# Altium PCB business_card.PcbDoc (part 1 of 2)
Units mil, origin at the board's own origin, x right, y up, seen from the top; angles counter-clockwise.
Board outline 3500 x 2000 mil, 2 copper layers (Top Layer, Bottom Layer); 64 components, 43 nets, 178 pads, 88 vias.
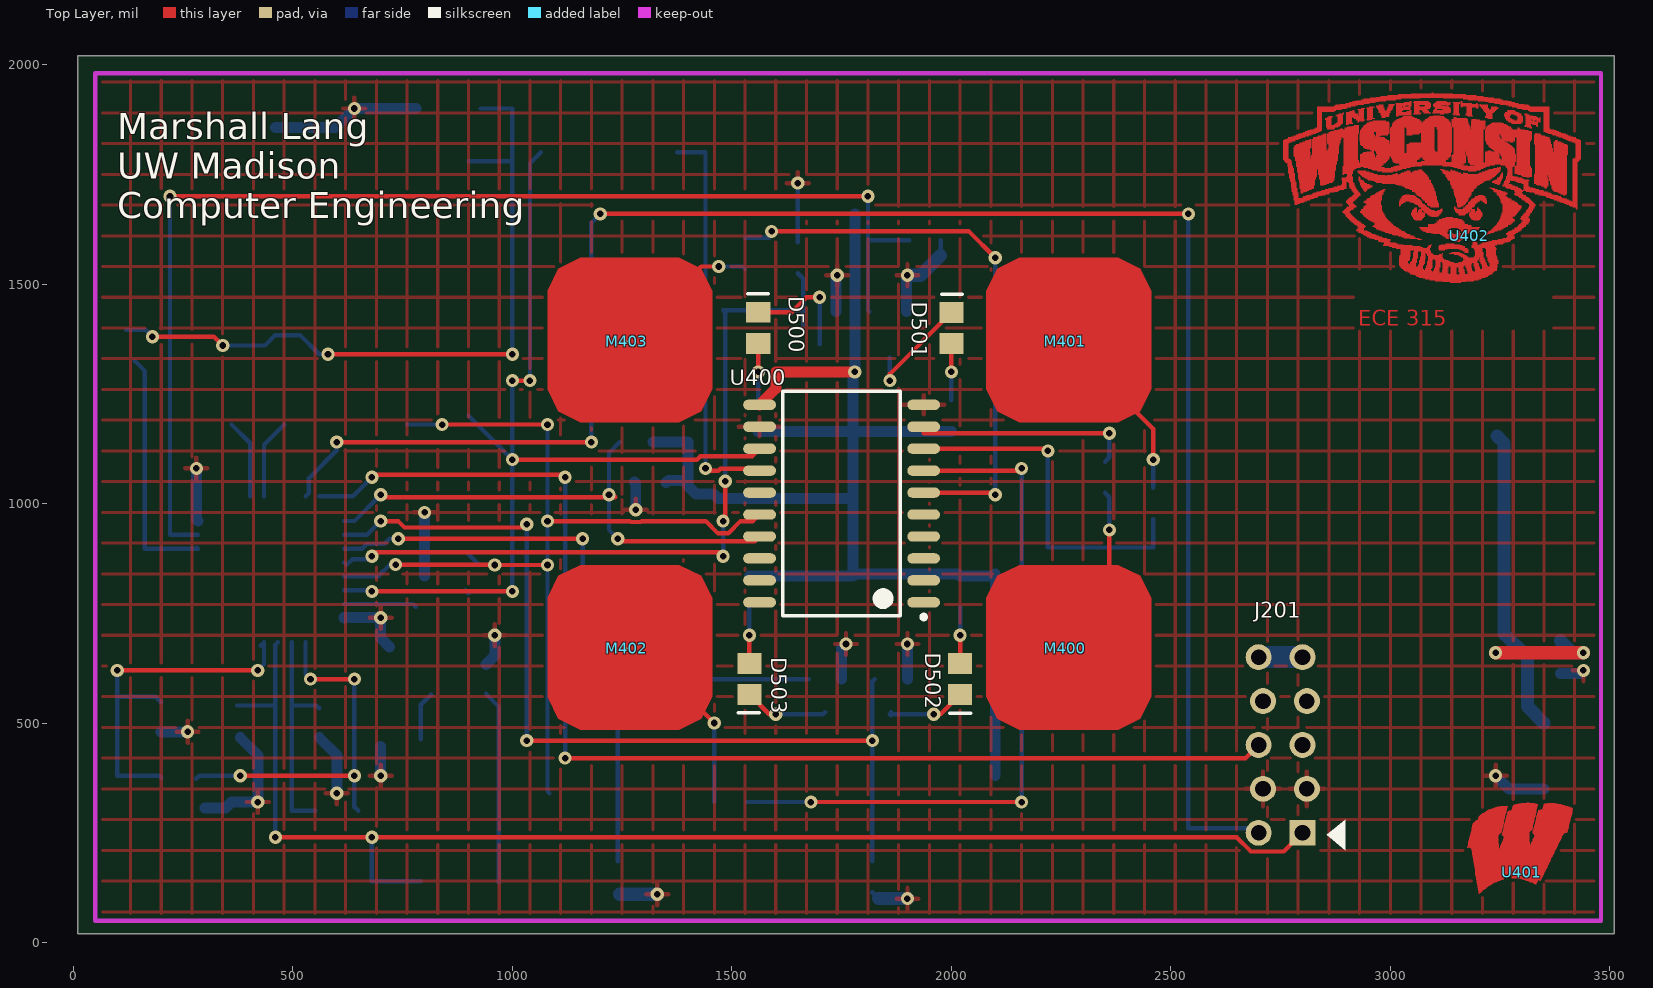
[diagram p0: Top Layer view]
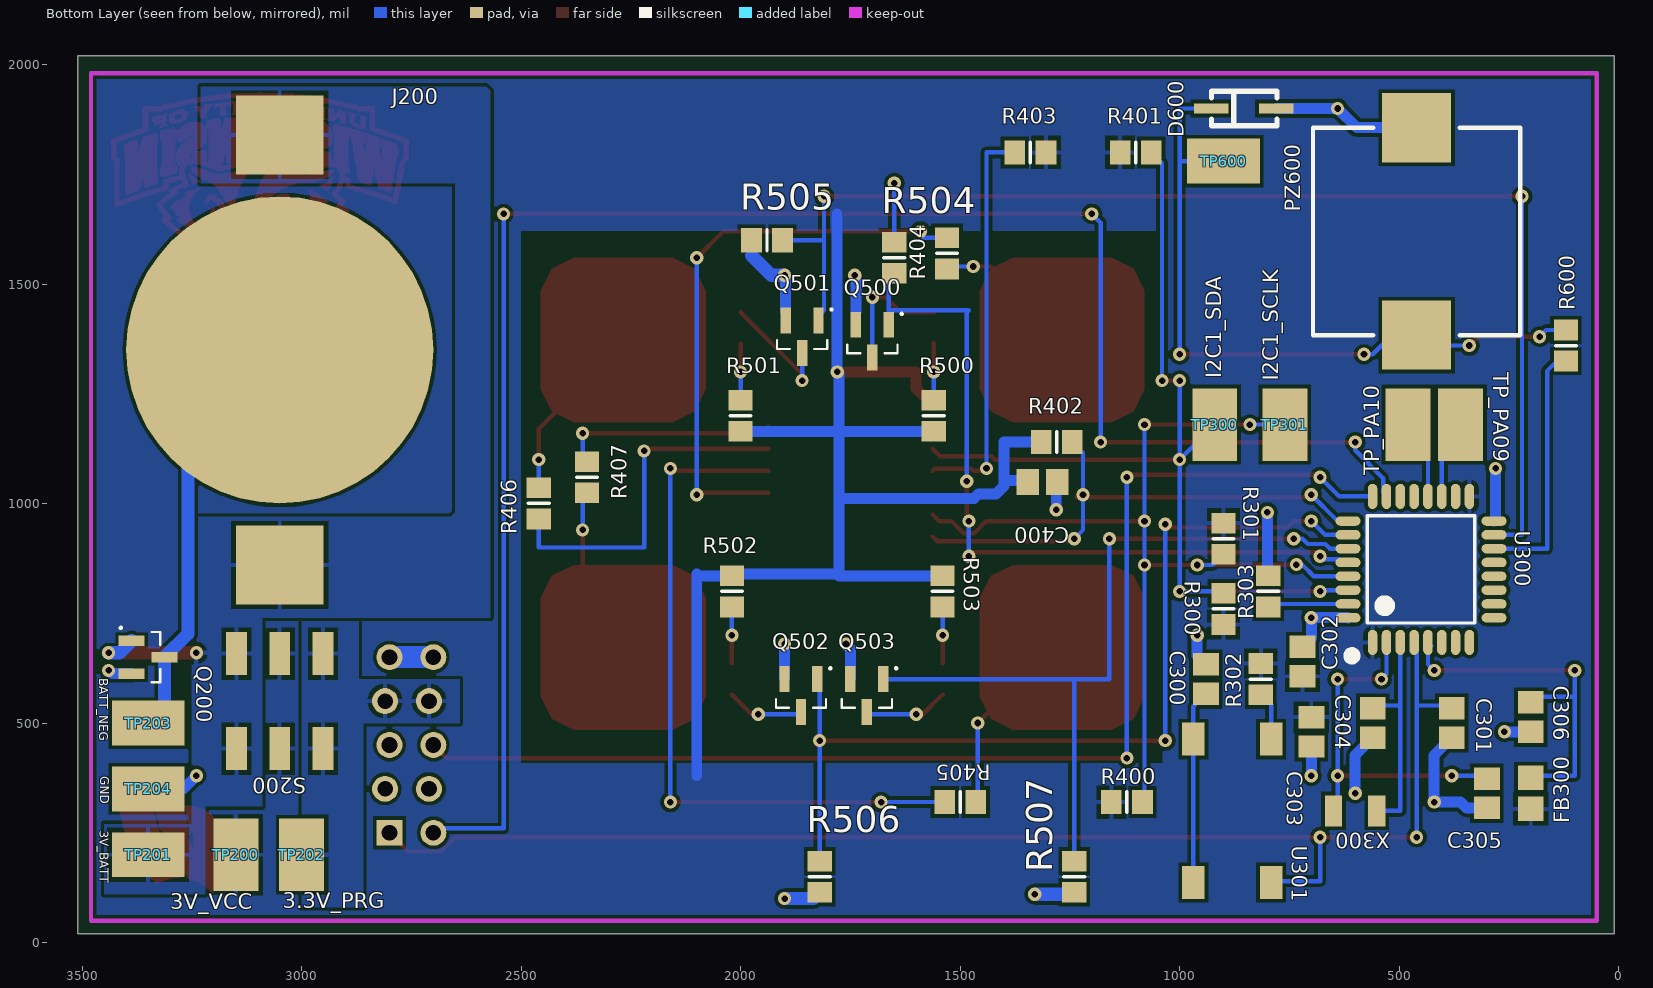
[diagram p1: Bottom Layer view, seen from below]

## Layer stack, top to bottom
Top Solder: solder mask 0.4, Solder Resist, Dk 3.5
Top Layer: signal copper 1.4
Dielectric 1: dielectric 12.6, FR-4, Dk 4.8
Bottom Layer: signal copper 1.4
Bottom Solder: solder mask 0.4, Solder Resist, Dk 3.5

## Board outline
10,20 3510,20 3510,2020 10,2020

## Design rules (kind name [scope] priority, off if disabled: settings)
BoardOutlineClearance [All] p1: gap=10 ignorepadtopadclearanceinfootprint=FALSE except(0: Arc-SplitContinuation Track-SplitContinuation SMDPad-SplitContinuation THPad-SplitContinuation Via-SplitContinuation Fill-SplitContinuation Poly-SplitContinuation Region-SplitContinuation Text-SplitContinuation)
Clearance [All] p1: gap=8 ignorepadtopadclearanceinfootprint=FALSE except(0: Arc-Hole Track-Hole SMDPad-Hole THPad-Hole Via-Hole Fill-Hole Poly-Hole Region-Hole Text-Hole)
HoleSize [All] p1: absolutevalues=TRUE maxlimit=100 minlimit=15 maxpercent=80.000 minpercent=20.000
MinimumAnnularRing [All] p1: minimumring=6
MinimumSolderMaskSliver [All] p1: minsoldermaskwidth=0
PlaneConnect Direct [All] p1: planeconnectstyle=Direct reliefexpansion=20 reliefentries=4 reliefconductorwidth=10 reliefairgap=10
PolygonConnect [All] p1: connectstyle=Relief reliefconductorwidth=10 reliefentries=4 polygonreliefangle="90 Angle" airgapwidth=10
RoomDefinition 02-Power [InComponentClass('02-Power')] p1: confinementstyle=ConfineIn formatcopy=TRUE lockcomponents=FALSE outline 3480,50 2620,50 2620,1990 3480,1990
RoomDefinition 03_MCU [InComponentClass('03_MCU')] p2: confinementstyle=ConfineIn formatcopy=TRUE lockcomponents=FALSE outline 1000,50 54.49,50 54.49,1280 1000,1280
RoomDefinition 06_Buzzer [InComponentClass('06_Buzzer')] p3: confinementstyle=ConfineIn formatcopy=TRUE lockcomponents=FALSE outline 1000,1280 60,1280 60,1950 1000,1950
RoomDefinition 05_LEDs [InComponentClass('05_LEDs')] p4: confinementstyle=ConfineIn formatcopy=TRUE lockcomponents=FALSE outline 1010,70 2590,70 2590,1640 1010,1640
RoutingVias [All] p1: holewidth=15 width=30 viastyle="Through Hole" minholewidth=15 minwidth=30 maxholewidth=28 maxwidth=50
SilkToSilkClearance [All] p1: silktosilkclearance=5
SilkToSolderMaskClearance [IsPad] p1: minsilkscreentomaskgap=0 clearancetoexposedcopper=TRUE
SolderMaskExpansion [All] p1: expansion=4
Width Wisc_Art_Work [HasFootprint('BUCKYBADGER') or HasFootprint('Motion_W')] p1: maxlimit=50 minlimit=99999 preferedwidth=0 toplayer_minwidth=0 bottomlayer_minwidth=0 minimp=50.000000 maximp=50.000000 favimp=50.000000
Width Width_1 [All] p2: maxlimit=50 minlimit=10 preferedwidth=10 minimp=50.000000 maximp=50.000000 favimp=50.000000
25 further rules are at their usual default settings.

## Classes and differential pairs
component class 05_LEDs: D500 D501 D502 D503 Q500 Q501 Q502 Q503 R500 R501 R502 R503 R504 R505 R506 R507
component class 03_MCU: C300 C301 C302 C303 C304 C305 C306 FB300 R300 R301 R302 R303 TP300 TP301 TP_PA09 TP_PA10 U300 U301 X300
component class 06_Buzzer: D600 PZ600 R600 TP600
component class 02-Power: J200 J201 Q200 S200 TP200 TP201 TP202 TP203 TP204

## Components (designator, comment, footprint, x,y, rotation, side; value= is the part's Value field where it differs from the comment)
C300 "CAP_0805_U_001.00" CAP_0805 940,600 r90 bottom
C301 "CAP_0805_U_001.00" CAP_0805 380,500 r270 bottom
C302 "CAP_0805_U_001.00" CAP_0805 720,640 r90 bottom
C303 "CAP_0805_U_001.00" CAP_0805 700,480 r270 bottom
C304 "4.3pF" CAP_0805 560,500 r90 bottom
C305 "4.3pF" CAP_0805 300,340 r90 bottom
C306 "CAP_0805_U_001.00" CAP_0805 200,513.46 r270 bottom
C400 "CAP_0805_U_001.00" CAP_0805 1312,1049 r180 bottom
D500 "LED_GREEN_0805.1" LED_GRN_0805 1560,1400.31 r270 top
D501 "LED_RED_0805.1" LED_RED_0805 2000,1400 r270 top
D502 "LED_ORANGE.0805.1" LED_ORG_0805 2020,600.31 r90 top
D503 "LED_YELLOW_0805.1" LED_YEL_0805 1540,600.31 r90 top
D600 "DIODE_4148" SOD323-12 927.64,1900 r270 bottom
FB300 "330 ohm @ 100 MHz" FB_0805 200,340 r90 bottom
J200 "CONN_BAT_2032" BATT_2032 3050,1350 r90 bottom
J201 "CONN_ST_PROGRAMMER" HDR_5x2 2805,250 r90 top
M400 "Mech_TouchPad" TOUCHPAD 2260,670 r0 top locked
M401 "Mech_TouchPad" TOUCHPAD 2260,1370 r0 top locked
M402 "Mech_TouchPad" TOUCHPAD 1260,670 r0 top locked
M403 "Mech_TouchPad" TOUCHPAD 1260,1370 r0 top locked
PZ600 "Peizo Buzzer" PKLCS 460,1620 r90 bottom
Q200 "IC_NMOS_DMN2020LSN" SOT23 3350,650 r180 bottom
Q500 "IC_NMOS_DMN2020LSN" SOT23 1700,1370 r270 bottom
Q501 "IC_NMOS_DMN2020LSN" SOT23 1860,1380 r270 bottom
Q502 "IC_NMOS_DMN2020LSN" SOT23 1862.6,562.6 r270 bottom
Q503 "IC_NMOS_DMN2020LSN" SOT23 1712.6,562.6 r270 bottom
R300 "10K" RES_0805 900,760 r270 bottom
R301 "10K" RES_0805 900,920 r90 bottom
R302 "10K" RES_0805 815,600 r90 bottom
R303 "10K" RES_0805 798,800 r270 bottom
R400 "RES_0805_R_562_00" RES_0805 1120,320 r0 bottom
R401 "RES_0805_R_562_00" RES_0805 1100,1800 r0 bottom
R402 "RES_0805_R_562_00" RES_0805 1280,1140 r0 bottom
R403 "RES_0805_R_562_00" RES_0805 1340,1800 r180 bottom
R404 "RES_0805_R_562_00" RES_0805 1530,1570 r270 bottom
R405 "RES_0805_R_562_00" RES_0805 1499.69,320 r180 bottom
R406 "RES_0805_R_562_00" RES_0805 2460,1000.31 r90 bottom
R407 "RES_0805_R_562_00" RES_0805 2350,1060 r270 bottom
R500 "330" RES_0805 1560,1200 r270 bottom
R501 "330" RES_0805 2000,1200 r270 bottom
R502 "330" RES_0805 2020,800 r90 bottom
R503 "330" RES_0805 1540,800 r90 bottom
R504 "10K" RES_0805 1650,1560 r270 bottom
R505 "10K" RES_0805 1940,1600 r180 bottom
R506 "10K" RES_0805 1820,150 r90 bottom
R507 "10K" RES_0805 1240,150 r90 bottom
R600 "RES_0805_K_001.00" RES_0805 120,1360 r90 bottom
S200 "SW DPDT" DPDT 3050,550 r180 bottom
TP200 "TP_1206" TP-SMC-1206 3150,200 r270 bottom
TP201 "TP_1206" TP-SMC-1206 3350,200 r0 bottom
TP202 "TP_1206" TP-SMC-1206 3000,200 r270 bottom
TP203 "TP_1206" TP-SMC-1206 3350,500 r180 bottom
TP204 "TP_1206" TP-SMC-1206 3350,350 r180 bottom
TP300 "TP_1206" TP-SMC-1206 920,1180 r90 bottom
TP301 "TP_1206" TP-SMC-1206 760,1180 r270 bottom
TP600 "TP_1206" TP-SMC-1206 900,1780 r180 bottom
TP_PA09 "TP_1206" TP-SMC-1206 360,1180 r90 bottom
TP_PA10 "TP_1206" TP-SMC-1206 480,1180 r270 bottom
U300 "IC_STM32F303K8T6_1" IC_STM32FM 450,850 r90 bottom
U301 "SW_6mm_6mm_SMT" SW_6mm_6mm_SMT 880,300 r90 bottom
U400 "IC_AT42QT2120" IC_AT42QT2120 1750,1000 r180 top
U401 "Motion_W" Motion_W 3300,160 r0 top
U402 "Bucky" BuckyBadger 3180,1610 r0 top
X300 "32.7680KHZ 12.5PF" NX3215SA-32.768K-STD-MUA-8 600,300 r0 bottom

## Footprints (in the part's own frame and the unit in brackets; to place one, negate y for a bottom-side part, rotate by r counter-clockwise, add the part's x,y. Pads: shape width x height; smd on the part's side, far side on the other; paste and mask are expansions set on the pad)
BATT_2032 [mil] "HOLDER BATTERY 20MM COIN"
  round 700 smd: 1(0,0)
  rect 180x200 smd: 2(-490,0) 3(490,0)
  body extent -599,-398 609,385, height 150
BuckyBadger [mil] "BuckyBadger Logo"
  Top Layer drawing of 2083 lines, arcs and shapes, not listed
CAP_0805 [mm]
  rect 1.3x1.5 smd: 1(-0.85,0) 2(0.85,0)
  body extent -1.1,-0.72 1.1,0.72, height 1.1
DPDT [mm] "SWITCH SLIDE DPDT 300MA 6V"
  rect 1.2x2.5 smd: 1(-2.5,-2.75) 2(0,-2.75) 3(2.5,-2.75) 4(-2.5,2.75) 5(0,2.75) 6(2.5,2.75)
FB_0805 [mm] "Chip Inductor, Body 2.0x1.2mm, IPC Medium Density"
  rect 1.4x1.5 smd: 1(-0.9,0) 2(0.9,0)
  body extent -1.1,-0.7 1.1,0.7, height 1.1
HDR_5x2 [mm] "HEADER 10POS SOCKET DL 2.54 MM"
  rect 1.5x1.5 hole 0.9: 1(0,0.127)
  round 1.5 hole 0.9: 2(0,2.667) 3(2.54,-0.127) 4(2.54,2.413) 5(5.08,0.127) 6(5.08,2.667) 7(7.62,-0.127) 8(7.62,2.413) 9(10.16,0.127) 10(10.16,2.667)
  silkscreen extent -1.02,-2.34 0.76,-1.27, body extent -1.55,-1.14 11.65,3.94, height 8.64
IC_AT42QT2120 [mm] "SOIC, 20-Leads, Body 12.80x7.50mm, Pitch 1.27mm, IPC Medium Density"
  oval 1.9x0.6 smd: 1(-4.75,5.715) 2(-4.75,4.445) 3(-4.75,3.175) 4(-4.75,1.905) 5(-4.75,0.635) 6(-4.75,-0.635) 7(-4.75,-1.905) 8(-4.75,-3.175) 9(-4.75,-4.445) 10(-4.75,-5.715) 11(4.75,-5.715) 12(4.75,-4.445) 13(4.75,-3.175) 14(4.75,-1.905) 15(4.75,-0.635) 16(4.75,0.635) 17(4.75,1.905) 18(4.75,3.175) 19(4.75,4.445) 20(4.75,5.715)
  silkscreen extent -4.88,-6.5 3.4,6.69, body extent -3.8,-6.5 3.8,6.5, height 2.65
IC_STM32FM [mm] "ST QFP 32 Pins"
  oval 1.45x0.55 smd: 1(-4.225,2.8) 2(-4.225,2) 3(-4.225,1.2) 4(-4.225,0.4) 5(-4.225,-0.4) 6(-4.225,-1.2) 7(-4.225,-2) 8(-4.225,-2.8) 17(4.225,-2.8) 18(4.225,-2) 19(4.225,-1.2) 20(4.225,-0.4) 21(4.225,0.4) 22(4.225,1.2) 23(4.225,2) 24(4.225,2.8)
  oval 0.55x1.45 smd: 9(-2.8,-4.225) 10(-2,-4.225) 11(-1.2,-4.225) 12(-0.4,-4.225) 13(0.4,-4.225) 14(1.2,-4.225) 15(2,-4.225) 16(2.8,-4.225) 25(2.8,4.225) 26(2,4.225) 27(1.2,4.225) 28(0.4,4.225) 29(-0.4,4.225) 30(-1.2,4.225) 31(-2,4.225) 32(-2.8,4.225)
  silkscreen extent -5.25,-3.1 3.1,4.25, body extent -3.5,-3.5 3.5,3.5, height 1.6
LED_GRN_0805 [mm]
  rect 1.2x1.4 smd: 1(-0.9,0) 2(0.9,0)
  silkscreen extent -1.98,-0.61 -1.98,0.59, body extent -1.07,-0.7 1.07,0.7, height 0.8
LED_ORG_0805 [mm]
  rect 1.2x1.4 smd: 1(-0.9,0) 2(0.9,0)
  silkscreen extent -1.98,-0.61 -1.98,0.59, body extent -1.07,-0.7 1.07,0.7, height 0.8
LED_RED_0805 [mm]
  rect 1.2x1.4 smd: 1(-0.9,0) 2(0.9,0)
  silkscreen extent -1.96,-0.56 -1.96,0.64, body extent -1.07,-0.7 1.07,0.7, height 0.8
LED_YEL_0805 [mm]
  rect 1.2x1.4 smd: 1(-0.9,0) 2(0.9,0)
  silkscreen extent -1.96,-0.56 -1.96,0.64, body extent -1.07,-0.7 1.07,0.7, height 0.8
Motion_W [mil]
  Top Layer lines w1: -125,57 -123,57 ; -124,58 -53,58 ; -124,59 -53,59 ; -124,60 -53,60 ; -124,61 -53,61 ; -123,62 -53,62 ; -123,63 -53,63 ; -123,64 -53,64 ; -123,65 -53,65 ; -122,66 -54,66 ; -122,67 -54,67 ; -122,68 -54,68 ; -122,69 -54,69 ; -122,70 -54,70 ; -121,71 -54,71 ; -121,72 -54,72 ; -121,73 -54,73 ; -120,74 -54,74 ; -120,75 -54,75 ; -120,76 -54,76 ; -120,77 -54,77 ; -120,78 -55,78 ; -119,57 -53,57 ; -119,79 -55,79 ; -119,80 -55,80 ; -119,81 -54,81 ; -119,82 -54,82 ; -118,83 -54,83 ; -118,84 -54,84 ; -118,85 -54,85 ; -118,86 -54,86 ; -117,56 -53,56 ; -117,87 -53,87 ; -117,88 -52,88 ; -117,89 -51,89 ; -117,90 -50,90 ; -116,55 -53,55 ; -116,91 -47,91 ; -116,92 -47,92 ; -116,93 -47,93 ; -116,94 -51,94 ; -115,53 77,53 ; -115,54 -53,54 ; -115,95 -46,95 ; -115,96 -46,96 ; -115,97 -46,97 ; -115,98 -46,98 ; -115,99 -45,99 ; -114,50 75,50 ; -114,51 76,51 ; -114,52 76,52 ; -114,100 -45,100 ; -114,101 -45,101 ; -114,102 -45,102 ; -113,41 71,41 ; -113,42 71,42 ; -113,43 72,43 ; -113,44 72,44 ; -113,45 73,45 ; -113,46 73,46 ; -113,47 74,47 ; -113,48 74,48 ; -113,49 75,49 ; -113,103 -44,103 ; -113,104 -44,104 ; -113,105 -44,105 ; -113,106 -44,106 ; -113,107 -44,107 ; -112,35 68,35 ; -112,36 69,36 ; -112,37 69,37 ; -112,38 -98,38 ; -112,39 70,39 ; -112,40 70,40 ; -112,108 -43,108 ; -112,109 -43,109 ; -112,110 -43,110 ; -112,111 -43,111 ; -111,29 65,29 ; -111,30 66,30 ; -111,31 66,31 ; -111,32 66,32 ; -111,33 67,33 ; -111,34 67,34 ; -111,112 -42,112 ; -110,22 -15,22 ; -110,23 62,23 ; -110,24 63,24 ; -110,25 63,25 ; -110,26 64,26 ; -110,27 64,27 ; -110,28 65,28 ; -110,113 -42,113 ; -109,15 59,15 ; -109,16 59,16 ; -109,17 59,17 ; -109,18 60,18 ; -109,19 60,19 ; -109,20 61,20 ; -109,21 61,21 ; -109,114 -42,114 ; -108,10 56,10 ; -108,11 56,11 ; -108,12 57,12 ; -108,13 57,13 ; -108,14 58,14 ; -108,115 -42,115 ; -107,3 -28,3 ; -107,4 -27,4 ; -107,5 -27,5 ; -107,6 -26,6 ; -107,7 54,7 ; -107,8 55,8 ; -107,9 55,9 ; -107,116 -42,116 ; -106,-4 -31,-4 ; -106,-3 -30,-3 ; -106,-2 -30,-2 ; -106,-1 -29,-1 ; -106,0 -29,0 ; -106,1 -29,1 ; -106,2 -28,2 ; -105,-9 -39,-9 ; -105,-8 -38,-8 ; -105,-7 -38,-7 ; -105,-6 -36,-6 ; -105,-5 -31,-5 ; -105,117 -42,117 ; -104,-16 -45,-16 ; -104,-15 -41,-15 ; -104,-14 -41,-14 ; -104,-13 -40,-13 ; -104,-12 -40,-12 ; -104,-11 -40,-11 ; -104,-10 -39,-10 ; -104,118 -41,118 ; -103,-23 -63,-23 ; -103,-22 -61,-22 ; -103,-21 -59,-21 ; -103,-20 -56,-20 ; -103,-19 -54,-19 ; -103,-18 -51,-18 ; -103,-17 -48,-17 ; -102,-28 -72,-28 ; -102,-27 -70,-27 ; -102,-26 -69,-26 ; -102,-25 -67,-25 ; -102,-24 -65,-24 ; -102,119 -41,119 ; -101,-35 -82,-35 ; -101,-34 -81,-34 ; -101,-33 -79,-33 ; -101,-32 -78,-32 ; -101,-31 -77,-31 ; -101,-30 -75,-30 ; -101,-29 -74,-29 ; -101,120 -41,120 ; -100,-41 -90,-41 ; -100,-40 -89,-40 ; -100,-39 -87,-39 ; -100,-38 -86,-38 ; -100,-37 -85,-37 ; -100,-36 -83,-36 ; -100,121 -40,121 ; -100,122 -40,122 ; -100,123 -40,123 ; -100,124 -39,124 ; -99,-47 -96,-47 ; -99,-46 -95,-46 ; -99,-45 -94,-45 ; -99,-44 -93,-44 ; -99,-43 -92,-43 ; -99,-42 -91,-42 ; -99,125 -39,125 ; -99,126 -97,126 ; -99,127 -39,127 ; -98,-48 -97,-48 ; -97,38 70,38 ; -97,128 -95,128 ; -96,126 -39,126 ; -96,129 -39,129 ; -95,130 -38,130 ; -94,128 -39,128 ; -94,131 -38,131 ; -93,132 -38,132 ; -91,133 -38,133 ; -90,134 -37,134 ; -88,135 -37,135 ; -86,136 -37,136 ; -85,137 -36,137 ; -83,138 -36,138 ; -82,139 -36,139 ; -80,140 -36,140 ; -78,141 -36,141 ; -77,142 -36,142 ; -74,143 -35,143 ; -72,144 -35,144 ; -69,145 -35,145 ; -66,146 -35,146 ; -63,147 -34,147 ; -60,148 -34,148 ; -56,149 -34,149 ; -52,54 77,54 ; -51,55 78,55 ; -51,56 78,56 ; -50,57 79,57 ; -50,58 79,58 ; -50,94 -47,94 ; -49,59 80,59 ; -49,60 80,60 ; -49,150 -33,150 ; -48,61 81,61 ; -48,62 18,62 ; -47,63 18,63 ; -47,64 18,64 ; -47,65 18,65 ; -46,66 18,66 ; -46,67 18,67 ; -46,86 16,86 ; -45,68 18,68 ; -45,69 17,69 ; -45,70 17,70 ; -45,85 16,85 ; -45,87 16,87 ; -45,88 16,88 ; -45,89 16,89 ; -45,90 16,90 ; -44,71 -35,71 ; -44,72 17,72 ; -44,91 16,91 ; -44,92 17,92 ; -44,93 17,93 ; -44,94 18,94 ; -43,73 17,73 ; -43,74 17,74 ; -43,75 17,75 ; -43,84 16,84 ; -43,95 19,95 ; -43,96 20,96 ; -43,97 23,97 ; -43,98 23,98 ; -42,76 17,76 ; -42,77 17,77 ; -42,78 16,78 ; -42,79 16,79 ; -42,82 16,82 ; -42,83 16,83 ; -42,99 23,99 ; -42,100 23,100 ; -42,101 24,101 ; -42,102 24,102 ; -41,80 16,80 ; -41,81 16,81 ; -41,103 24,103 ; -41,104 24,104 ; -41,105 25,105 ; -41,106 25,106 ; -40,107 25,107 ; -40,108 25,108 ; -40,109 25,109 ; -40,110 25,110 ; -39,111 26,111 ; -39,112 26,112 ; -39,113 26,113 ; -39,114 27,114 ; -38,115 27,115 ; -38,116 27,116 ; -38,117 27,117 ; -37,118 27,118 ; -37,119 28,119 ; -37,120 28,120 ; -37,121 28,121 ; -37,122 28,122 ; -36,123 28,123 ; -36,124 29,124 ; -36,125 29,125 ; -36,126 29,126 ; -35,127 27,127 ; -35,128 30,128 ; -35,129 30,129 ; -35,130 30,130 ; -34,71 17,71 ; -34,131 31,131 ; -34,132 31,132 ; -34,133 31,133 ; -34,134 31,134 ; -33,135 31,135 ; -33,136 31,136 ; -33,137 32,137 ; -33,138 32,138 ; -32,139 32,139 ; -29,140 32,140 ; -25,3 53,3 ; -25,4 53,4 ; -25,5 53,5 ; -25,6 54,6 ; -24,-7 47,-7 ; -24,-6 48,-6 ; -24,-5 48,-5 ; -24,-4 49,-4 ; -24,-3 49,-3 ; -24,-2 -12,-2 ; -24,-1 51,-1 ; -24,0 51,0 ; -24,1 51,1 ; -24,2 52,2 ; -23,-12 45,-12 ; -23,-11 45,-11 ; -23,-10 46,-10 ; -23,-9 47,-9 ; -23,-8 47,-8 ; -23,141 33,141 ; -23,142 33,142 ; -23,143 33,143 ; -23,144 33,144 ; -22,145 34,145 ; -22,146 34,146 ; -22,147 34,147 ; -21,148 34,148 ; -21,149 35,149 ; -21,150 35,150 ; -21,151 35,151 ; -20,152 35,152 ; -20,153 -15,153 ; -18,154 36,154 ; -14,22 61,22 ; -14,155 36,155 ; -13,153 35,153 ; -12,-13 44,-13 ; -11,-2 50,-2 ; -9,156 27,156 ; -6,-14 44,-14 ; -2,157 28,157 ; 0,-15 44,-15 ; 4,-16 43,-16 ; 7,-17 37,-17 ; 10,-18 36,-18 ; 11,158 16,158 ; 14,-19 36,-19 ; 16,-20 35,-20 ; 19,-21 35,-21 ; 19,62 81,62 ; 20,63 82,63 ; 20,64 82,64 ; 20,65 83,65 ; 21,-22 34,-22 ; 21,66 29,66 ; 21,67 84,67 ; 22,68 84,68 ; 22,69 85,69 ; 23,70 85,70 ; 23,71 86,71 ; 24,-23 34,-23 ; 24,72 86,72 ; 24,73 87,73 ; 24,90 96,90 ; 25,74 87,74 ; 25,75 88,75 ; 25,91 100,91 ; 25,92 103,92 ; 25,93 103,93 ; 25,94 103,94 ; 26,-24 33,-24 ; 26,76 88,76 ; 26,77 88,77 ; 26,89 95,89 ; 26,95 104,95 ; 26,96 104,96 ; 26,97 104,97 ; 27,78 89,78 ; 27,79 89,79 ; 27,88 94,88 ; 27,98 104,98 ; 27,99 105,99 ; 27,100 105,100 ; 27,101 105,101 ; 27,102 105,102 ; 28,-25 33,-25 ; 28,80 90,80 ; 28,81 90,81 ; 28,82 91,82 ; 28,87 94,87 ; 28,103 106,103 ; 28,104 106,104 ; 28,105 106,105 ; 28,106 106,106 ; 28,127 29,127 ; 28,156 33,156 ; 29,83 91,83 ; 29,84 92,84 ; 29,85 92,85 ; 29,86 91,86 ; 29,107 107,107 ; 29,108 107,108 ; 29,109 107,109 ; 30,-26 32,-26 ; 30,66 83,66 ; 30,110 107,110 ; 30,111 108,111 ; 30,112 108,112 ; 30,113 108,113 ; 30,114 108,114 ; 31,115 109,115 ; 31,116 109,116 ; 31,117 109,117 ; 31,118 109,118 ; 32,119 110,119 ; 32,120 110,120 ; 32,121 110,121 ; 32,122 110,122 ; 33,123 111,123 ; 33,124 111,124 ; 33,125 111,125 ; 33,126 111,126 ; 34,127 111,127 ; 34,128 112,128 ; 34,129 112,129 ; 34,130 112,130 ; 35,131 113,131 ; 35,132 113,132 ; 35,133 113,133 ; 35,134 113,134 ; 36,135 114,135 ; 36,136 114,136 ; 36,137 114,137 ; 37,138 114,138 ; 37,139 115,139 ; 37,140 115,140 ; 37,141 115,141 ; 39,-17 43,-17 ; 41,-18 42,-18 ; 41,142 115,142 ; 46,143 115,143 ; 47,144 116,144 ; 47,145 116,145 ; 47,146 115,146 ; 47,147 113,147 ; 48,148 110,148 ; 48,149 108,149 ; 48,150 49,150 ; 49,151 102,151 ; 49,152 99,152 ; 49,153 96,153 ; 49,154 92,154 ; 49,155 88,155 ; 50,150 104,150 ; 51,156 81,156 ; 57,157 75,157 ; 92,86 93,86 ; 101,91 102,91
NX3215SA-32.768K-STD-MUA-8 [mm] "CRYSTAL 32.7680KHZ 12.5PF SMD"
  rect 1x1.8 smd: 1(-1.25,0) 2(1.25,0)
PKLCS [mm] "Piezo Buzzer umuRata"
  rect 4x4 smd: 1(-6,0) 2(6,0)
  silkscreen extent -6,-6 6,6
RES_0805 [mm] "Chip Resistor, Body 2.0x1.3mm, IPC Medium Density"
  rect 1.2x1.4 smd: 1(-0.9,0) 2(0.9,0)
  silkscreen extent 0,-0.6 0,0.6, body extent -1.07,-0.7 1.07,0.7, height 0.65
SOD323-12 [mm] "Diode"
  rect 0.6x2 smd: 1(0,0) 2(0,3.75)
  silkscreen extent -1,0 1,3.8
SOT23 [mm] "SOT23, 3-Leads, Body 2.9x1.3mm, Pitch 0.95mm, Lead Span 2.5mm, IPC Medium Density"
  rect 1.5x0.6 smd: 1(-0.95,0.95) 2(-0.95,-0.95) 3(0.95,0)
  silkscreen extent -1.64,-1.45 0.7,1.76, body extent -1.4,-1.45 1.4,1.45, height 1.3
SW_6mm_6mm_SMT [mm] "Surface Mount Pushbutton"
  rect 1.9x1.3 smd: 1(-4.15,2.25) 2(4.15,2.25) 3(-4.15,-2.25) 4(4.15,-2.25)
  body extent -5,-3 5,3, height 3.92
TOUCHPAD [mm] "Cap Touch Pad"
  round 0.1 smd: 1(0,0)
  Top Layer region: 4.953,2.921 4.953,-2.794 4.318,-4.064 3.048,-4.699 -2.667,-4.699 -3.937,-4.064 -4.572,-2.794 -4.572,2.921 -3.937,4.191 -2.667,4.826 3.048,4.826 4.318,4.191
TP-SMC-1206 [mm] "Surface mount test point 1206"
  rect 4.2x2.6 smd mask+0: 1(0,0)
  body extent -1.57,-0.79 1.63,0.81, height 1.22

## Part data
C300 C301 C302 C303 C306: "CAP CER 1UF 16V 10% X7R 0805", Manufacturer=Yageo, Manufacturer Part Number=CC0805KKX7R7BB105, Operating Temperature="-55°C ~ 125°C", Package / Case="0805 (2012 Metric)", Ratings=-, Supplier Part Number 1=1uF, Temperature Coefficient=X7R, Tolerance=±10%, Voltage - Rated=16V, Applications="General Purpose", Category=Capacitors, ComponentLink1Description=http://www.yageo.com/documents/recent/UPY-GPHC_X7R_6.3V-to-50V_18.pdf, ComponentLink1URL=http://www.yageo.com/documents/recent/UPY-GPHC_X7R_6.3V-to-50V_18.pdf, Failure Rate=-, Features=-, Height - Seated (Max)=-, Lead Spacing=-, Lead Style=-, Mounting Type="Surface Mount, MLCC", Notification="Current market demand for these product types have resulted in fluctuating and extending lead times. Lead times may differ.", Packaging="Cut Tape (CT)", Part Status=Active, Pricing 1="1=0.11, 10=0.079, 100=0.0352, 500=0.02516, 1000=0.01977 (USD)", RoHS="RoHS Compliant", Size / Dimension="0.079\" L x 0.049\" W (2.00mm x 1.25mm)", Stock 1=1059529, Supplier 1=Digi-Key, Thickness (Max)="0.049\" (1.25mm)"
C304 C305: library part CAP_0805_P_004.30, "CAP CER 4.3PF 100V NP0 0805", Manufacturer="AVX Corporation", Manufacturer Part Number=08051A4R3BAT2A, Operating Temperature="-55°C ~ 125°C", Package / Case="0805 (2012 Metric)", Ratings=-, Temperature Coefficient="C0G, NP0", Tolerance=±0.1pF, Voltage - Rated=100V, Applications="General Purpose", Category=Capacitors, ComponentLink1Description=http://datasheets.avx.com/C0GNP0-Dielectric.pdf, ComponentLink1URL=http://datasheets.avx.com/C0GNP0-Dielectric.pdf, Failure Rate=-, Features=-, Height - Seated (Max)=-, Lead Spacing=-, Lead Style=-, Mounting Type="Surface Mount, MLCC", Notification="Current market demand for these product types have resulted in fluctuating and extending lead times. Lead times may differ.", Packaging="Tape & Reel (TR)", Part Status=Active, Pricing 1="4000=0.231 (USD)", RoHS="RoHS Compliant", Size / Dimension="0.079\" L x 0.049\" W (2.01mm x 1.25mm)", Stock 1=0, Supplier 1=Digi-Key, Thickness (Max)="0.037\" (0.94mm)"
C400: "CAP CER 1UF 16V 10% X7R 0805", Manufacturer=Yageo, Manufacturer Part Number=CC0805KKX7R7BB105, Operating Temperature="-55°C ~ 125°C", Package / Case="0805 (2012 Metric)", Ratings=-, Supplier Part Number 1=311-1365-1-ND, Temperature Coefficient=X7R, Tolerance=±10%, Voltage - Rated=16V, Applications="General Purpose", Category=Capacitors, ComponentLink1Description=http://www.yageo.com/documents/recent/UPY-GPHC_X7R_6.3V-to-50V_18.pdf, ComponentLink1URL=http://www.yageo.com/documents/recent/UPY-GPHC_X7R_6.3V-to-50V_18.pdf, Failure Rate=-, Features=-, Height - Seated (Max)=-, Lead Spacing=-, Lead Style=-, Mounting Type="Surface Mount, MLCC", Notification="Current market demand for these product types have resulted in fluctuating and extending lead times. Lead times may differ.", Packaging="Cut Tape (CT)", Part Status=Active, Pricing 1="1=0.11, 10=0.079, 100=0.0352, 500=0.02516, 1000=0.01977 (USD)", RoHS="RoHS Compliant", Size / Dimension="0.079\" L x 0.049\" W (2.00mm x 1.25mm)", Stock 1=1059529, Supplier 1=Digi-Key, Thickness (Max)="0.049\" (1.25mm)"
D500: "LED GREEN CLEAR THIN 0805 SMD", Emitting Color="Yellow Green", Forward Current="30 mA", Forward Voltage="2.4 V", Manufacturer="Vishay / Lite-On", Manufacturer Part Number=LTST-C171KGKT, Operating Temperature Classification=Industrial, Operating Temp Range="-55C to 85C", Package Type="Chip Led", Power Dissipation="75 W", Reverse Voltage="5 V", Supplier Part Number 1=160-1426-1-ND, Test Current (It)="20 mA", Chip Material=AlGaInP, ComponentLink1Description=https://datasheet.ciiva.com/15118/getdatasheetpartid-214542-15118099.pdf, ComponentLink1URL=https://datasheet.ciiva.com/15118/getdatasheetpartid-214542-15118099.pdf, ComponentLink2Description=https://datasheet.ciiva.com/16200/lite-on20ltst-c171kgkt-16200100.pdf, ComponentLink2URL=https://datasheet.ciiva.com/16200/lite-on20ltst-c171kgkt-16200100.pdf, ComponentLink3Description=https://datasheet.ciiva.com/2110/s-110-ltst-c171kgkt-2110072.pdf, ComponentLink3URL=https://datasheet.ciiva.com/2110/s-110-ltst-c171kgkt-2110072.pdf, ComponentLink4Description=https://datasheet.ciiva.com/2110/s-110-ltst-c171kgkt-2110073.pdf, ComponentLink4URL=https://datasheet.ciiva.com/2110/s-110-ltst-c171kgkt-2110073.pdf, ComponentLink5Description=https://datasheet.ciiva.com/11774/0900766b80dc0298-11774377.pdf, ComponentLink5URL=https://datasheet.ciiva.com/11774/0900766b80dc0298-11774377.pdf, ComponentLink6Description=https://datasheet.ciiva.com/2110/s-110-ltst-c171kgkt-2110074.pdf, ComponentLink6URL=https://datasheet.ciiva.com/2110/s-110-ltst-c171kgkt-2110074.pdf, ComponentLink7Description=https://datasheet.ciiva.com/12400/lite-on-ltst-c171kgkt-187692-12400799.pdf, ComponentLink7URL=https://datasheet.ciiva.com/12400/lite-on-ltst-c171kgkt-187692-12400799.pdf, DELETED=Compliant, Dominant Wave Length="571 nm", High Brightness=Yes, Lens Dimensions="1.4x1.25x0.5 mm", Luminous Intensity=35mcd, Lum Intensity=35mcd, Main Category="Chip LED", Mounting="Surface Mount", Number of  Elements=1, Packaging="Tape and Reel", Peak Wavelength="574 nm", Pin Count=2, Pricing 1="1=0.31, 10=0.225, 25=0.1656, 100=0.1183, 250=0.0804, 500=0.071, 1000=0.0556 (USD)", Product Depth (mm)="1.25 mm", Product Height (mm)="0.8 mm", Product Length (mm)="2 mm", Rad Hardened=No, Shape Type=Rectangular, Stock 1=322411, Supplier 1=Digi-Key, Type=Uni-Color, Viewing Angle="130 deg"
D501: "LED SUPER RED CLR THIN 0805 SMD", Emitting Color=Red, Forward Current="30 mA", Forward Voltage="2.4 V", Manufacturer="Vishay / Lite-On", Manufacturer Part Number=LTST-C171KRKT, Operating Temperature Classification=Industrial, Operating Temp Range="-55C to 85C", Package Type="Chip Led", Power Dissipation="75 W", Reverse Voltage="5 V", Supplier Part Number 1=160-1427-1-ND, Test Current (It)="20 mA", Chip Material=AlGaInP, ComponentLink1Description=https://datasheet.ciiva.com/2110/s-110-ltst-c171krkt-2110066.pdf, ComponentLink1URL=https://datasheet.ciiva.com/2110/s-110-ltst-c171krkt-2110066.pdf, ComponentLink2Description=https://datasheet.ciiva.com/2110/s-110-ltst-c171krkt-2110067.pdf, ComponentLink2URL=https://datasheet.ciiva.com/2110/s-110-ltst-c171krkt-2110067.pdf, ComponentLink3Description=https://datasheet.ciiva.com/2110/s-110-ltst-c171krkt-2110068.pdf, ComponentLink3URL=https://datasheet.ciiva.com/2110/s-110-ltst-c171krkt-2110068.pdf, ComponentLink4Description=https://datasheet.ciiva.com/12403/lite-on-ltst-c171krkt-187201-12403781.pdf, ComponentLink4URL=https://datasheet.ciiva.com/12403/lite-on-ltst-c171krkt-187201-12403781.pdf, ComponentLink5Description=https://datasheet.ciiva.com/11775/0900766b80dc0299-11775643.pdf, ComponentLink5URL=https://datasheet.ciiva.com/11775/0900766b80dc0299-11775643.pdf, ComponentLink6Description=https://datasheet.ciiva.com/16444/lite-on20ltst-c171krkt-16444779.pdf, ComponentLink6URL=https://datasheet.ciiva.com/16444/lite-on20ltst-c171krkt-16444779.pdf, DELETED=Compliant, Dominant Wave Length="631 nm", High Brightness=Yes, Lens Dimensions="1.4x1.25x0.5 mm", Luminous Intensity=54mcd, Lum Intensity=54mcd, Main Category="Chip LED", Mounting="Surface Mount", Number of  Elements=1, Packaging="Tape and Reel", Peak Wavelength="639 nm", Pin Count=2, Pricing 1="1=0.31, 10=0.225, 25=0.1656, 100=0.1183, 250=0.0804, 500=0.071, 1000=0.0556 (USD)", Product Depth (mm)="1.25 mm", Product Height (mm)="0.8 mm", Product Length (mm)="2 mm", Rad Hardened=No, Shape Type=Rectangular, Stock 1=97347, Supplier 1=Digikey, Type=Uni-Color, Viewing Angle="130 deg"
D502: "LED ORANGE DIFFUSED 0805 SMD", Color=Orange, Forward (Drive) Current="25 mA", Forward Voltage="2 V", Manufacturer=Rohm, Manufacturer Part Number=SML-210DTT86, Supplier Part Number 1=511-1284-1-ND, ComponentLink1Description=https://datasheet.ciiva.com/2110/sml-21-2110727.pdf, ComponentLink1URL=https://datasheet.ciiva.com/2110/sml-21-2110727.pdf, ComponentLink2Description=https://datasheet.ciiva.com/2110/sml-21-2110728.pdf, ComponentLink2URL=https://datasheet.ciiva.com/2110/sml-21-2110728.pdf, ComponentLink3Description=https://datasheet.ciiva.com/2110/sml-21-2110729.pdf, ComponentLink3URL=https://datasheet.ciiva.com/2110/sml-21-2110729.pdf, ComponentLink4Description=https://datasheet.ciiva.com/11773/0900766b80df3a40-11773931.pdf, ComponentLink4URL=https://datasheet.ciiva.com/11773/0900766b80df3a40-11773931.pdf, ComponentLink5Description=https://datasheet.ciiva.com/16488/sml-210ltt86-16488028.pdf, ComponentLink5URL=https://datasheet.ciiva.com/16488/sml-210ltt86-16488028.pdf, Dimension="2 x 1.25 x 0.8 mm", Intensity="6.3 mcd", Lens Type=Clear, Pricing 1="1=0.39, 10=0.277, 25=0.2404, 100=0.1848, 250=0.1502, 500=0.1109, 1000=0.0924 (USD)", Stock 1=28453, Supplier 1=Digikey, Viewing Angle="130 °"
D503: "LED YELLOW CLEAR THIN 0805 SMD", Emitting Color=Amber, Forward Current="30 mA", Forward Voltage="2.4 V", Manufacturer="Vishay / Lite-On", Manufacturer Part Number=LTST-C171KSKT, Operating Temperature Classification=Industrial, Operating Temp Range="-55C to 85C", Package Type="Chip Led", Power Dissipation="75 W", Reverse Voltage="5 V", Supplier Part Number 1=160-1428-1-ND, Test Current (It)="20 mA", Chip Material=AlGaInP, ComponentLink1Description=https://datasheet.ciiva.com/15118/getdatasheetpartid-233685-15118145.pdf, ComponentLink1URL=https://datasheet.ciiva.com/15118/getdatasheetpartid-233685-15118145.pdf, ComponentLink2Description=https://datasheet.ciiva.com/2110/s-110-ltst-c171kskt-2110147.pdf, ComponentLink2URL=https://datasheet.ciiva.com/2110/s-110-ltst-c171kskt-2110147.pdf, ComponentLink3Description=https://datasheet.ciiva.com/2110/s-110-ltst-c171kskt-2110148.pdf, ComponentLink3URL=https://datasheet.ciiva.com/2110/s-110-ltst-c171kskt-2110148.pdf, ComponentLink4Description=https://datasheet.ciiva.com/19466/2075639-19466196.pdf, ComponentLink4URL=https://datasheet.ciiva.com/19466/2075639-19466196.pdf, ComponentLink5Description=https://datasheet.ciiva.com/2110/s-110-ltst-c171kskt-2110149.pdf, ComponentLink5URL=https://datasheet.ciiva.com/2110/s-110-ltst-c171kskt-2110149.pdf, ComponentLink6Description=https://datasheet.ciiva.com/16200/lite-on20ltst-c171kskt-16200102.pdf, ComponentLink6URL=https://datasheet.ciiva.com/16200/lite-on20ltst-c171kskt-16200102.pdf, ComponentLink7Description=https://datasheet.ciiva.com/12403/lite-on-ltst-c171kskt-190118-12403721.pdf, ComponentLink7URL=https://datasheet.ciiva.com/12403/lite-on-ltst-c171kskt-190118-12403721.pdf, ComponentLink8Description=https://datasheet.ciiva.com/11774/0900766b80dc029a-11774587.pdf, ComponentLink8URL=https://datasheet.ciiva.com/11774/0900766b80dc029a-11774587.pdf, DELETED=Compliant, Dominant Wave Length="587 nm", High Brightness=Yes, Lens Dimensions="1.4x1.25x0.5 mm", Luminous Intensity=50mcd, Lum Intensity=50mcd, Main Category="Chip LED", Mounting="Surface Mount", Number of  Elements=1, Packaging="Tape and Reel", Peak Wavelength="588 nm", Pin Count=2, Pricing 1="1=0.33, 10=0.239, 25=0.1764, 100=0.126, 250=0.0856, 500=0.0756, 1000=0.0592 (USD)", Product Depth (mm)="1.25 mm", Product Height (mm)="0.8 mm", Product Length (mm)="2 mm", Rad Hardened=No, Shape Type=Rectangular, Stock 1=18113, Supplier 1=Digikey, Type=Uni-Color, Viewing Angle="130 deg"
D600: "DIODE GEN PURP 100V 300MA SOD123", Manufacturer=Diodes, Manufacturer Part Number=1N4148W--7-F, Maximum Forward Voltage=1.25V, Maximum Reverse Voltage=100V, Package Type=SOD-123, Supplier Part Number 1=1N4148W-FDICT-ND, ComponentLink1Description=http://uk.rs-online.com/webdocs/0f8c/0900766b80f8c94e.pdf, ComponentLink1URL=http://uk.rs-online.com/webdocs/0f8c/0900766b80f8c94e.pdf, Diode Configuration=Single, Mounting Type="Surface Mount", Number of Elements per Chip=1, Pin Count=2, Pricing 1="1=0.18, 10=0.164, 100=0.0891, 500=0.0548, 1000=0.0374 (USD)", Stock 1=993734, Supplier 1=Digi-Key
FB300: library part "FB 330 ohm @ 100 MHz", Current Rating=2.5A, DC Resistance (DCR)="50 mOhm Max", Impedance @ Frequency="330 Ohm @ 100MHz", Manufacturer="TDK Corporation", Manufacturer Part Number=MPZ2012S331AT000, Package / Case="0805 (2012 Metric)", Supplier Part Number 1=445-1569-1-ND, Category=Filters, ComponentLink1Description=http://product.tdk.com/en/catalog/datasheets/beads_commercial_power_mpz_en.pdf, ComponentLink1URL=http://product.tdk.com/en/catalog/datasheets/beads_commercial_power_mpz_en.pdf, Filter Type="Differential Mode - Single", Height (Max)="0.041\" (1.05mm)", Mounting Type="Surface Mount", Packaging="Cut Tape (CT)", Pricing 1="1=0.12, 10=0.101, 100=0.0574, 250=0.04528, 500=0.03824, 1000=0.03221 (USD)", RoHS="RoHS Compliant", Size / Dimension="0.079\" L x 0.049\" W (2.00mm x 1.25mm)", Stock 1=154063, Supplier 1=Digi-Key
J200: "HOLDER BATTERY 20MM COIN", Manufacturer=Linx, Manufacturer Part Number=BAT-HLD-001, Operating Temperature=-, Supplier Part Number 1=BAT-HLD-001-ND, Battery Cell Size="20 mm", Battery Series="2025, 2032", Battery Type, Function="Coin Cell, Retainer", Brand="Linx Technologies", Category="Battery Products", ComponentLink1Description=https://datasheet.ciiva.com/4/bat-hld-001-4035.pdf, ComponentLink1URL=https://datasheet.ciiva.com/4/bat-hld-001-4035.pdf, ComponentLink2Description=https://datasheet.ciiva.com/4642/bat-hld-001-220194-4642567.pdf, ComponentLink2URL=https://datasheet.ciiva.com/4642/bat-hld-001-220194-4642567.pdf, ComponentLink3Description=https://datasheet.ciiva.com/16207/bat-hld-001-16207212.pdf, ComponentLink3URL=https://datasheet.ciiva.com/16207/bat-hld-001-16207212.pdf, ComponentLink4Description=https://www.linxtechnologies.com/resources/diagrams/bat-hld-001.pdf, ComponentLink4URL=https://www.linxtechnologies.com/resources/diagrams/bat-hld-001.pdf, Factory Pack Quantity=1000, Height Above Board="0.165\" (4.20mm)", Mounting Type="PCB, Surface Mount", Number of Batteries="1 Battery", Number of Cells=1, Number of Contacts="1 Contact", Packaging=Bulk, Part Status=Active, Pricing 1="1=0.28, 25=0.2572, 100=0.233, 1000=0.2196 (USD)", Pricing 2="1=0.28, 25=0.2572, 100=0.233, 1000=0.2196 (USD)", Product="Battery Holders", Product Category="Coin Cell Battery Holders", RoHS=Details, Stock 1=950, Stock 2=69651, Style=Retainer, Supplier 1=Digikey, Supplier 2=Digi-Key, Supplier Part Number 2=BAT-HLD-001-ND, Termination Style=SMD/SMT, Type="20 mm Battery Holder"
J201: "CONN HEADER 2.54MM 10POS GOLD", Current Rating=3A, Insulation Color=Black, Manufacturer="Wurth Electronics Inc.", Manufacturer Part Number=61301021821, Material Flammability Rating="UL94 V-0", Operating Temperature="-40°C ~ 105°C", Supplier Part Number 1=732-2861-ND, Voltage Rating=250VAC, Applications=-, Category="Connectors, Interconnects", ComponentLink1Description=http://katalog.we-online.de/em/datasheet/6130xx21821.pdf, ComponentLink1URL=http://katalog.we-online.de/em/datasheet/6130xx21821.pdf, Connector Type=Header, Contact Finish - Mating=Gold, Contact Finish - Post=Gold, Contact Finish Thickness - Mating=-, Contact Finish Thickness - Post=-, Contact Length - Post="0.122\" (3.10mm)", Contact Material="Copper Alloy", Contact Shape=Square, Contact Type=Forked, Fastening Type=Push-Pull, Features=-, Ingress Protection=-, Insulation Height="0.331\" (8.40mm)", Insulation Material="Polybutylene Terephthalate (PBT)", Mated Stacking Heights=-, Mounting Type="Through Hole", Number of Positions=10, Number of Positions Loaded=All, Packaging=Tray, Part Status=Active, Pitch - Mating="0.100\" (2.54mm)", Pricing 1="1=0.74, 10=0.728, 50=0.672, 100=0.616, 320=0.56 (USD)", RoHS="RoHS Compliant", Row Spacing - Mating="0.100\" (2.54mm)", Stock 1=4086, Style="Board to Board", Supplier 1=Digi-Key, Termination=Solder
M400 M401 M402 M403: "Capacative Touch Sensor Pad"
PZ600: library part Peizo, "AUDIO PIEZO TRANSDUCER 12.5V SMD", Frequency=2kHz, Manufacturer="Murata Electronics North America", Manufacturer Part Number=PKLCS1212E2000-R1, Operating Mode="Single Tone", Operating Temperature="-20°C ~ 70°C", Supplier Part Number=490-5260-1-ND, Voltage - Rated=1.5V, Voltage Range="12.5V (Max)", Category="Audio Products", Driver Circuitry="Transducer, Externally Driven", Input Type="Zero-Peak Signal", Mounting Type="Surface Mount", Packaging="Cut Tape (CT)", Port Location=Side, RoHS="RoHS Compliant", Size / Dimension="12.0mm L x 12.0mm W x 3.0mm H", Sound Pressure Level="70dB @ 1.5V, 10cm", Supplier=Digi-Key, Technology=Piezo, Termination="Solder Pads"
Q200 Q500 Q501 Q502 Q503: Case/Package=SC, Continuous Drain Current (ID)=6.9A, Drain to Source Resistance=13mR, Drain to Source Voltage (Vdss)=20V, Gate to Source Voltage (Vgs)=12V, Input Capacitance=1.149nF, Manufacturer=Diodes, Manufacturer Part Number=DMN2020LSN-7, Max Operating Temperature=150°C, Max Power Dissipation=610mW, Min Operating Temperature=-55°C, Package Quantity=3000, Supplier Part Number 1=DMN2020LSN-7DICT-ND, Threshold Voltage=1V, ComponentLink1Description=https://datasheet.ciiva.com/934/ds31946-934870.pdf, ComponentLink1URL=https://datasheet.ciiva.com/934/ds31946-934870.pdf, ComponentLink2Description=https://datasheet.ciiva.com/25625/0900766b8104e58b-25625153.pdf, ComponentLink2URL=https://datasheet.ciiva.com/25625/0900766b8104e58b-25625153.pdf, ComponentLink3Description=https://datasheet.ciiva.com/4444/ds31946-65244-4444482.pdf, ComponentLink3URL=https://datasheet.ciiva.com/4444/ds31946-65244-4444482.pdf, ComponentLink4Description=https://datasheet.ciiva.com/934/ds31946-934871.pdf, ComponentLink4URL=https://datasheet.ciiva.com/934/ds31946-934871.pdf, ComponentLink5Description=https://datasheet.ciiva.com/934/ds31946-934872.pdf, ComponentLink5URL=https://datasheet.ciiva.com/934/ds31946-934872.pdf, Element Configuration=Single, Fall Time=12.33ns, Height=1.3mm, Lead Free="Lead Free", Length=3.1mm, Mount="Surface Mount", Number of Channels=1, Number of Elements=1, Number of Pins=3, Packaging="Tape and Reel", Power Dissipation=610mW, Pricing 1="1=0.52, 10=0.418, 100=0.2843, 500=0.2132, 1000=0.1599 (USD)", Rds On Max=20mR, REACH SVHC="No SVHC", Rise Time=12.49ns, Stock 1=13099, Supplier 1=Digikey, Turn-Off Delay Time=35.89ns, Turn-On Delay Time=11.67ns, Weight=0.000282oz, Width=1.7mm
R300 R301 R504 R505 R506 R507: library part RES_0805_K_010.00, "RES SMD 10K OHM 1% 1/8W 0805", Manufacturer=Yageo, Manufacturer Part Number=RC0805FR-0710KL, Operating Temperature="-55°C ~ 155°C", Package / Case="0805 (2012 Metric)", Power (Watts)="0.125W, 1/8W", Supplier Device Package=0805, Supplier Part Number 1=311-10.0KCRCT-ND, Temperature Coefficient=±100ppm/°C, Tolerance=±1%, Category=Resistors, ComponentLink1Description=http://www.yageo.com/documents/recent/PYu-RC_Group_51_RoHS_L_8.pdf, ComponentLink1URL=http://www.yageo.com/documents/recent/PYu-RC_Group_51_RoHS_L_8.pdf, Composition="Thick Film", Failure Rate=-, Features="Moisture Resistant", Height - Seated (Max)="0.024\" (0.60mm)", Packaging="Cut Tape (CT)", Part Status=Active, Pricing 1="1=0.1, 10=0.022, 100=0.0088, 1000=0.00396, 2500=0.00344 (USD)", RoHS="RoHS Compliant", Size / Dimension="0.079\" L x 0.049\" W (2.00mm x 1.25mm)", Stock 1=15506828, Supplier 1=Digi-Key
R302 R303: library part RES_0805_K_010.00, "RES SMD 10K OHM 1% 1/8W 0805", Manufacturer=Yageo, Manufacturer Part Number=RC0805FR-0710KL, Operating Temperature="-55°C ~ 155°C", Package / Case="0805 (2012 Metric)", Power (Watts)="0.125W, 1/8W", Supplier Device Package=0805, Temperature Coefficient=±100ppm/°C, Tolerance=±1%, Category=Resistors, ComponentLink1Description=http://www.yageo.com/documents/recent/PYu-RC_Group_51_RoHS_L_8.pdf, ComponentLink1URL=http://www.yageo.com/documents/recent/PYu-RC_Group_51_RoHS_L_8.pdf, Composition="Thick Film", Failure Rate=-, Features="Moisture Resistant", Height - Seated (Max)="0.024\" (0.60mm)", Packaging="Cut Tape (CT)", Part Status=Active, Pricing 1="1=0.1, 10=0.022, 100=0.0088, 1000=0.00396, 2500=0.00344 (USD)", RoHS="RoHS Compliant", Size / Dimension="0.079\" L x 0.049\" W (2.00mm x 1.25mm)", Stock 1=15506828, Supplier 1=Digi-Key, Supplier Part Number 1=10K
R400 R401 R402 R403 R404 R405 R406 R407: "RES SMD 562 OHM 1% 1/8W 0805", Manufacturer=Yageo, Manufacturer Part Number=RC0805FR-07562RL, Operating Temperature="-55°C ~ 155°C", Package / Case="0805 (2012 Metric)", Power (Watts)="0.125W, 1/8W", Supplier Device Package=0805, Supplier Part Number 1=311-562CRCT-ND, Temperature Coefficient=±100ppm/°C, Tolerance=±1%, Category=Resistors, ComponentLink1Description=http://www.yageo.com/documents/recent/PYu-RC_Group_51_RoHS_L_8.pdf, ComponentLink1URL=http://www.yageo.com/documents/recent/PYu-RC_Group_51_RoHS_L_8.pdf, Composition="Thick Film", Failure Rate=-, Features="Moisture Resistant", Height - Seated (Max)="0.024\" (0.60mm)", Packaging="Cut Tape (CT)", Part Status=Active, Pricing 1="1=0.1, 10=0.022, 100=0.0088, 1000=0.00396, 2500=0.00344 (USD)", RoHS="RoHS Compliant", Size / Dimension="0.079\" L x 0.049\" W (2.00mm x 1.25mm)", Stock 1=495223, Supplier 1=Digi-Key
R500 R501 R502 R503: library part RES_0805_R_330.00, "RES SMD 330 OHM 1% 1/8W 0805", Manufacturer=Yageo, Manufacturer Part Number=RC0805FR-07330RL, Operating Temperature="-55°C ~ 155°C", Package / Case="0805 (2012 Metric)", Power (Watts)="0.125W, 1/8W", Supplier Device Package=0805, Supplier Part Number 1=311-330CRCT-ND, Temperature Coefficient=±100ppm/°C, Tolerance=±1%, Category=Resistors, ComponentLink1Description=http://www.yageo.com/documents/recent/PYu-RC_Group_51_RoHS_L_8.pdf, ComponentLink1URL=http://www.yageo.com/documents/recent/PYu-RC_Group_51_RoHS_L_8.pdf, Composition="Thick Film", Failure Rate=-, Features="Moisture Resistant", Height - Seated (Max)="0.024\" (0.60mm)", Packaging="Cut Tape (CT)", Part Status=Active, Pricing 1="1=0.1, 10=0.022, 100=0.0088, 1000=0.00396, 2500=0.00344 (USD)", RoHS="RoHS Compliant", Size / Dimension="0.079\" L x 0.049\" W (2.00mm x 1.25mm)", Stock 1=1392719, Supplier 1=Digi-Key
R600: "RES SMD 1K OHM 1% 1/8W 0805", Manufacturer="Panasonic Electronic Components", Manufacturer Part Number=ERJ-6ENF1001V, Operating Temperature="-55°C ~ 155°C", Package / Case="0805 (2012 Metric)", Power (Watts)="0.125W, 1/8W", Resistance (Ohms)=1k, Supplier Device Package=0805, Supplier Part Number=P1.00KCCT-ND, Temperature Coefficient=±100ppm/°C, Tolerance=±1%, Category=Resistors, Composition="Thick Film", Failure Rate=-, Features="Automotive AEC-Q200", Height - Seated (Max)="0.028\" (0.70mm)", Number of Terminations=2, Packaging="Cut Tape (CT)", Part Status=Active, RoHS="RoHS Compliant", Size / Dimension="0.079\" L x 0.049\" W (2.00mm x 1.25mm)", Supplier=Digi-Key
S200: "Switch", Actuator Color=Black, Contact Rating @ Voltage="0.3@6VDC A", Dielectric Strength="500 VAC", Manufacturer="ITT /  C&K Components", Manufacturer Part Number=JS202011SCQN, Maximum AC Voltage Rating=N/A, Maximum Contact Resistance="70 mOhm", Maximum DC Voltage Rating="6 V", Minimum Insulation Resistance="100 MOhm", Operating Temperature="-40 to 85 C", Supplier Part Number 1=401-2002-1-ND, Actuator Material="Nylon 4/6", Actuator Style="Top Slide", Base Material=N/A, Body Orientation=Straight, Code_IPC=SOT26A-6, Code_JEITA=SC-74, ComponentLink1Description=https://datasheet.ciiva.com/23829/1707718-23829488.pdf, ComponentLink1URL=https://datasheet.ciiva.com/23829/1707718-23829488.pdf, ComponentLink2Description=https://datasheet.ciiva.com/2889/js-29aug13-2889127.pdf, ComponentLink2URL=https://datasheet.ciiva.com/2889/js-29aug13-2889127.pdf, ComponentLink3Description=https://datasheet.ciiva.com/2889/js-15sept15-2889128.pdf, ComponentLink3URL=https://datasheet.ciiva.com/2889/js-15sept15-2889128.pdf, ComponentLink4Description=https://datasheet.ciiva.com/2889/js-15sept15-2889129.pdf, ComponentLink4URL=https://datasheet.ciiva.com/2889/js-15sept15-2889129.pdf, ComponentLink5Description=https://datasheet.ciiva.com/22630/1707718-22630697.pdf, ComponentLink5URL=https://datasheet.ciiva.com/22630/1707718-22630697.pdf, ComponentLink6Description=https://datasheet.ciiva.com/8625/js-9dec14-8625470.pdf, ComponentLink6URL=https://datasheet.ciiva.com/8625/js-9dec14-8625470.pdf, Contact Material="Copper Alloy", Contact Plating=Silver, COO=US, Dimension="9 x 7.5 x 5.5 mm", ECCN=EAR99, Electrical Life="15000 Cycles", Family=JS, Housing Material="Nylon 4/6", HTS=8536509050, LatestRevisionDate=29-May-2009, LatestRevisionNote="IPC-7351 Footprint Added.", Mechanical Life=N/A, Mounting="Surface Mount,Gull Wing", PackageDescription="6-Pin SOT-23 Package 0.95 mm Pitch, 2.7 mm Lead Span", PackageReference=SOT23-6, PackageVersion=Mar-2001, Packaging="Tape and Reel", Part No=JS202011SCQN, Pole Throw Configuration=DPDT, Pricing 1="1=0.46, 10=0.441, 25=0.4316, 50=0.3858, 100=0.3674, 250=0.3582, 500=0.3031 (USD)", Product Weight=N/A, Published=24-Mar-1999, Publisher="Altium Limited", RoHS=Yes, Seal Description=N/A, Seal Location=N/A, Stock 1=22661, Supplier 1="C&K Components", Supplier Standard Pack=5,000, Switch Configuration=N/A, Type=Sub-Miniature
TP200 TP201 TP202 TP203 TP204 TP300 TP301 TP600 TP_PA09 TP_PA10: "Test Point SMD 1206", Case Size=1206, Manufacturer="TE Connectivity (Tyco Electronics)", Manufacturer Part Number=1625854-1, Operating Temperature="-55 to 125 C", Power Rating=N/R, Resistance Value="0 Ohm", Supplier Part Number 1=A106143CT-ND, ComponentLink1Description=https://datasheet.ciiva.com/6439/eng-ds-1773266-a-6439169.pdf, ComponentLink1URL=https://datasheet.ciiva.com/6439/eng-ds-1773266-a-6439169.pdf, ComponentLink2Description=https://datasheet.ciiva.com/30136/1773266-a-30136341.pdf, ComponentLink2URL=https://datasheet.ciiva.com/30136/1773266-a-30136341.pdf, ComponentLink3Description=https://datasheet.ciiva.com/6439/eng-ds-1773266-a-6439080.pdf, ComponentLink3URL=https://datasheet.ciiva.com/6439/eng-ds-1773266-a-6439080.pdf, ComponentLink4Description=https://datasheet.ciiva.com/6439/eng-ds-1773266-a-6439081.pdf, ComponentLink4URL=https://datasheet.ciiva.com/6439/eng-ds-1773266-a-6439081.pdf, ComponentLink5Description=https://datasheet.ciiva.com/6439/eng-ds-1773266-a-6439083.pdf, ComponentLink5URL=https://datasheet.ciiva.com/6439/eng-ds-1773266-a-6439083.pdf, Dimension="3.2 x 1.6 x 1.25mm", Family=RC, Mounting="Surface Mount", Packaging="Tape and Reel", Part No=1625854-1, Pricing 1="1=0.28, 10=0.261, 25=0.224, 50=0.1902, 100=0.1828, 250=0.1641, 500=0.1567, 1000=0.1306 (USD)", RoHS=Yes, Stock 1=31937, Supplier 1=Digi-Key, Temperature Coefficient=N/R, Terminal Pitch=N/R, Termination Style=N/R, Tolerance=N/R
U301: "SWITCH TACTILE SPST-NO 0.05A 12V", Contact Rating @ Voltage="0.05A @ 12VDC", Illumination Type, Color=-, Manufacturer=C&K, Manufacturer Part Number="PTS645SK50SMTR92 LFS", Operating Force=260gf, Operating Temperature="-20°C ~ 60°C", Supplier Part Number 1=CKN9087TR-ND, Actuator Height off PCB, Vertical=5.00mm, Actuator Length, Right Angle=-, Actuator Material="Polyamide (PA66), Nylon 6/6", Actuator Orientation="Top Actuated", Actuator Type=Standard, Category=Switches, Circuit=SPST-NO, ComponentLink1Description=http://www.ckswitches.com/media/1471/pts645.pdf, ComponentLink1URL=http://www.ckswitches.com/media/1471/pts645.pdf, Features=-, Illumination=Non-Illuminated, Illumination Voltage (Nominal)=-, Ingress Protection=-, Mechanical Life="100,000 Cycles", Mounting Type="Surface Mount", Outline="6.00mm x 6.00mm", Packaging="Tape & Reel (TR)", Part Status=Active, Pricing 1="1000=0.11797, 5000=0.09774 (USD)", RoHS="RoHS Compliant", Stock 1=162000, Supplier 1=Digi-Key, Switch Function=Off-Mom, Switch Travel=-, Termination Style="Gull Wing"
U400: Current - Supply=-, Manufacturer="Microchip Technology", Manufacturer Part Number=AT42QT2120-MMHR, Operating Temperature="-40°C ~ 85°C", Package / Case="20-VFQFN Exposed Pad", Supplier Device Package="20-VQFN (3x3)", Supplier Part Number 1=AT42QT2120-MMHRCT-ND, Voltage - Supply="1.8 V ~ 5.5 V", Category="Integrated Circuits (ICs)", ComponentLink1Description=http://www.microchip.com/mymicrochip/filehandler.aspx?ddocname=en590755, ComponentLink1URL=http://www.microchip.com/mymicrochip/filehandler.aspx?ddocname=en590755, Interface=I²C, LED Driver Channels="Up to 10", Number of Inputs="Up to 12", Packaging="Cut Tape (CT)", Part Status=Active, Pricing 1="1=1.47, 25=1.3464, 100=1.219 (USD)", Proximity Detection=Yes, Resolution=-, RoHS="RoHS Compliant", Stock 1=5883, Supplier 1=Digi-Key, Type="Buttons, Slider, Wheel"
U401: "Motion W Image", Manufacturer Part Number="UW Bucky"
U402: "Bucky Badger Image", Manufacturer Part Number="UW Bucky"
X300: library part CRYSTAL_NX3215SA-32.768K, "CRYSTAL 32.768KHZ 12.5PF SMD", ESR (Equivalent Series Resistance)="70 kOhm", Frequency=32.768kHz, Frequency Tolerance=±20ppm, Load Capacitance=12.5pF, Manufacturer="Nihon Dempa Kogyo (NDK)", Manufacturer Part Number=NX3215SA-32.768K-STD-MUA-8, Operating Mode=Fundamental, Operating Temperature="-40°C ~ 85°C", Package / Case=2-SMD, Standard Package=1, Supplier Part Number 1=644-1156-1-ND, Catalog Drawings="NX3215SA Series Top /  / NX3215SA Series Side /  / NX3215SA Series Bottom /  / NX3215SA Series Circuit", Category="Crystals and Oscillators", ComponentLink1Description=https://datasheet.ciiva.com/857/c-nx3215sa-std-mua-9-e-857050.pdf, ComponentLink1URL=https://datasheet.ciiva.com/857/c-nx3215sa-std-mua-9-e-857050.pdf, ComponentLink2Description=https://datasheet.ciiva.com/857/c-nx3215sa-std-mua-9-e-857051.pdf, ComponentLink2URL=https://datasheet.ciiva.com/857/c-nx3215sa-std-mua-9-e-857051.pdf, ComponentLink3Description=https://datasheet.ciiva.com/857/c-nx3215sa-std-mua-9-e-857052.pdf, ComponentLink3URL=https://datasheet.ciiva.com/857/c-nx3215sa-std-mua-9-e-857052.pdf, Dynamic Catalog="NX3215SA Series", Family=Crystals, Featured Product="NX3215SA Series 32.768KHz SMD Crystals", Height="0.035\" (0.90mm)", Mounting Type="Surface Mount", Other Names=644-1156-6, Packaging=Digi-Reel®, Pricing 1="1=0.94, 10=0.835, 50=0.7804, 100=0.6897, 500=0.6534, 1000=0.5445 (USD)", Series=NX3215SA, Size / Dimension="0.126\" L x 0.059\" W (3.20mm x 1.50mm)", Stock 1=45314, Supplier 1=Digikey, Type="kHz Crystal (Tuning Fork)"

## Via types
v1: diameter 30, hole 15, Top Layer to Bottom Layer, 88 vias

## Nets (pads, with @x,y where several pads share a name; then routed paths per layer and width w, separated by ;. In a path a pad name is that pad's centre, name@x,y a point inside that pad or via, vN(x,y) a via of type N, cw(c..) or ccw(c..) an arc to the next point about the centre after c; other vN are vias at no path point)
3.3V_PRG: J201.7 J201.8 S200.3 S200.6 TP202.1
3V_AVCC: C306.1 FB300.2 U300.5 | length 847.7
  Top Layer w10: v1(100,620) v1(420,620)
  Bottom Layer w10: v1(100,620) 100,560 ; FB300.2 195.43,380 100,380 100,560 ; C306.1 186.93,560 100,560 ; v1(420,620) 434.25,634.25 U300.5 U300.5@426.58,675.99
3V_BATT: J200.2 J200.3 Q200.1 S200.1 S200.4 TP201.1 | length 263.9
  Top Layer w30: v1(3240,660) v1(3440,660)
  Bottom Layer w30: Q200.1 3414.8,660 v1(3440,660)
3V_VCC: C302.1 C303.1 C400.1 FB300.1 R300.2 R301.2 R302.2 R400.2 R401.2 R402.2 R403.2 R500.2 R501.2 R502.2 R503.2 S200.2 S200.5 TP200.1 U300.1 U300.17 U400.11 | length 3184.4
  Top Layer w25: U400.11 1600,1262.01 1600,1300 v1(1780,1300)